# Altium PCB PMI_MotorDriver.PcbDoc
Units mil, origin at the board's own origin, x right, y up, seen from the top; angles counter-clockwise.
Board outline 1889.76 x 1535.43 mil, 2 copper layers (Top Layer, Bottom Layer); 35 components, 27 nets, 110 pads, 27 vias.
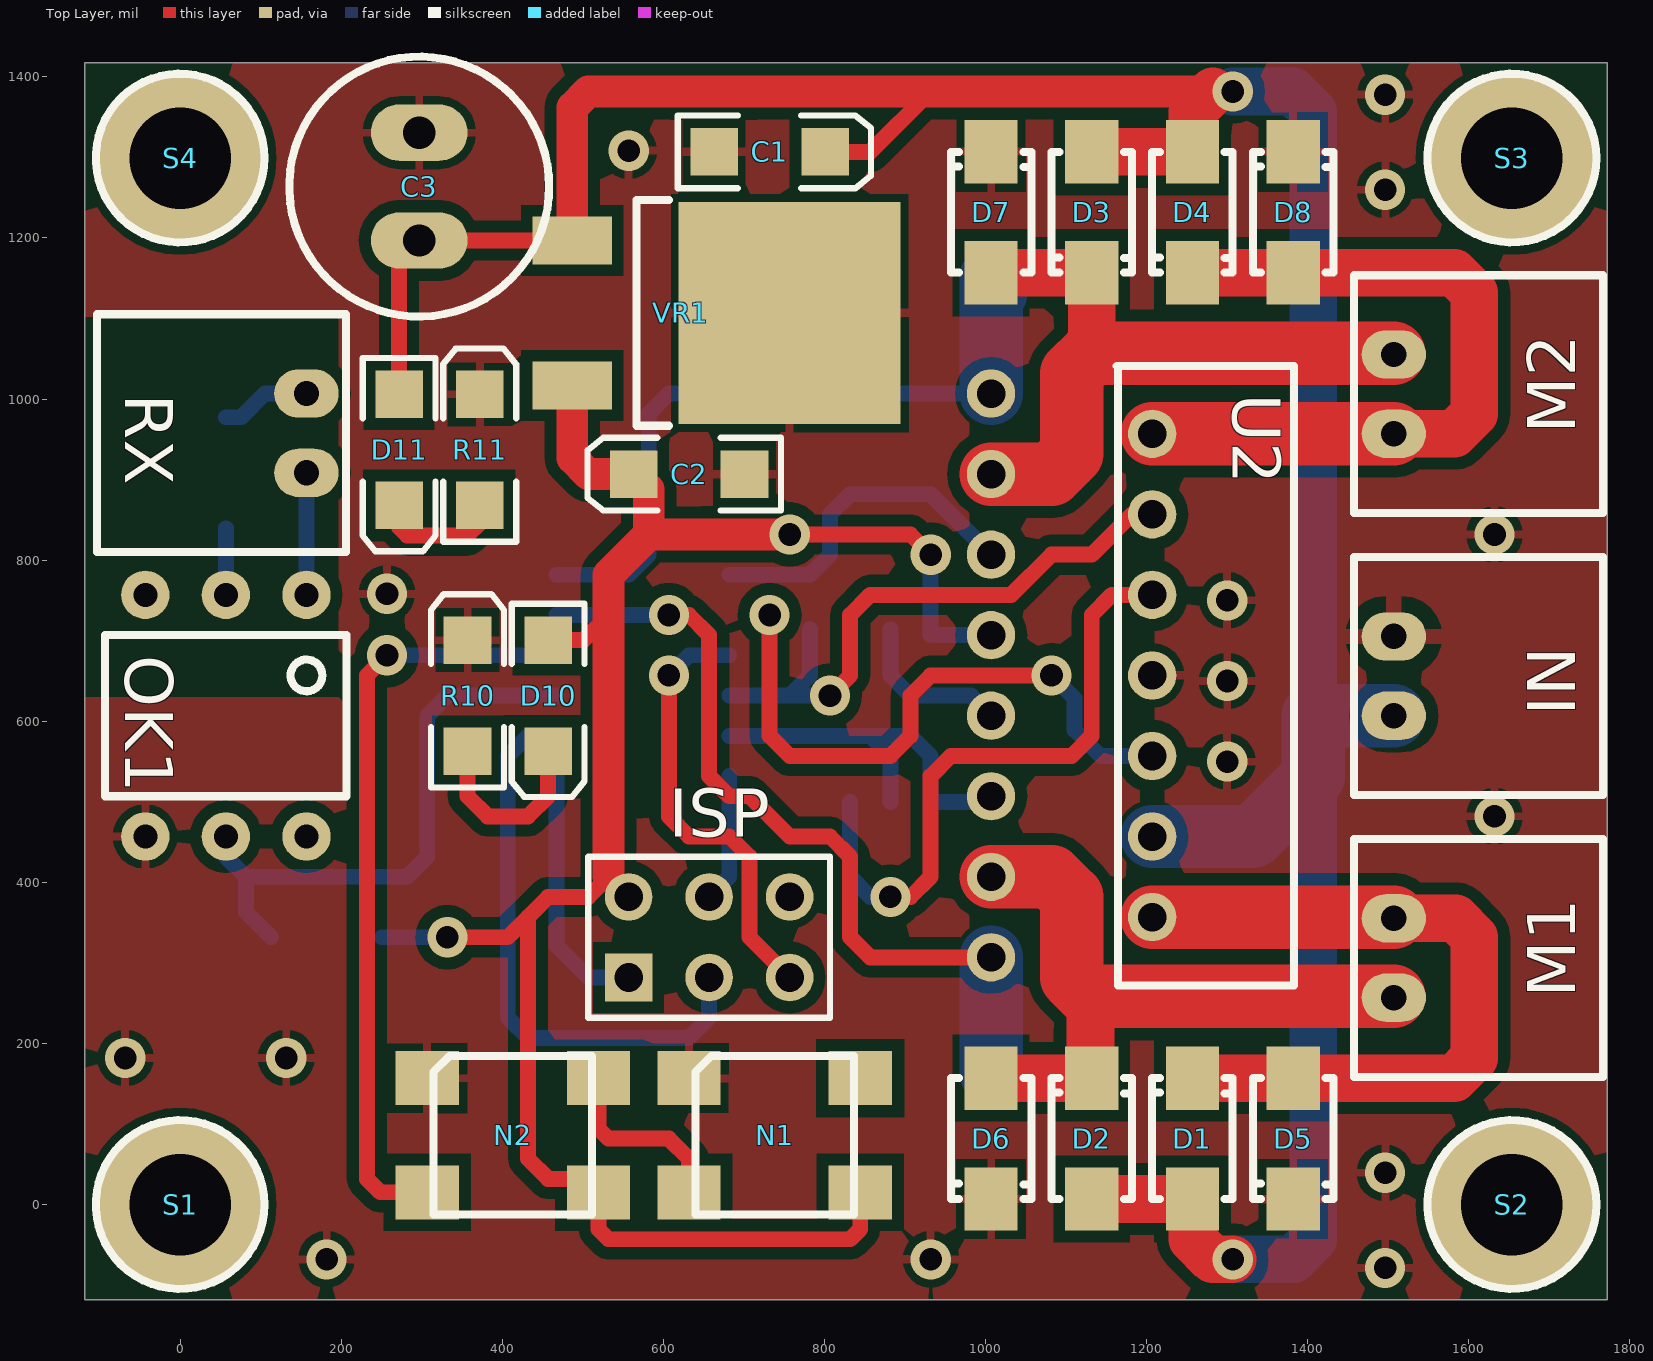
[diagram p0: Top Layer view]
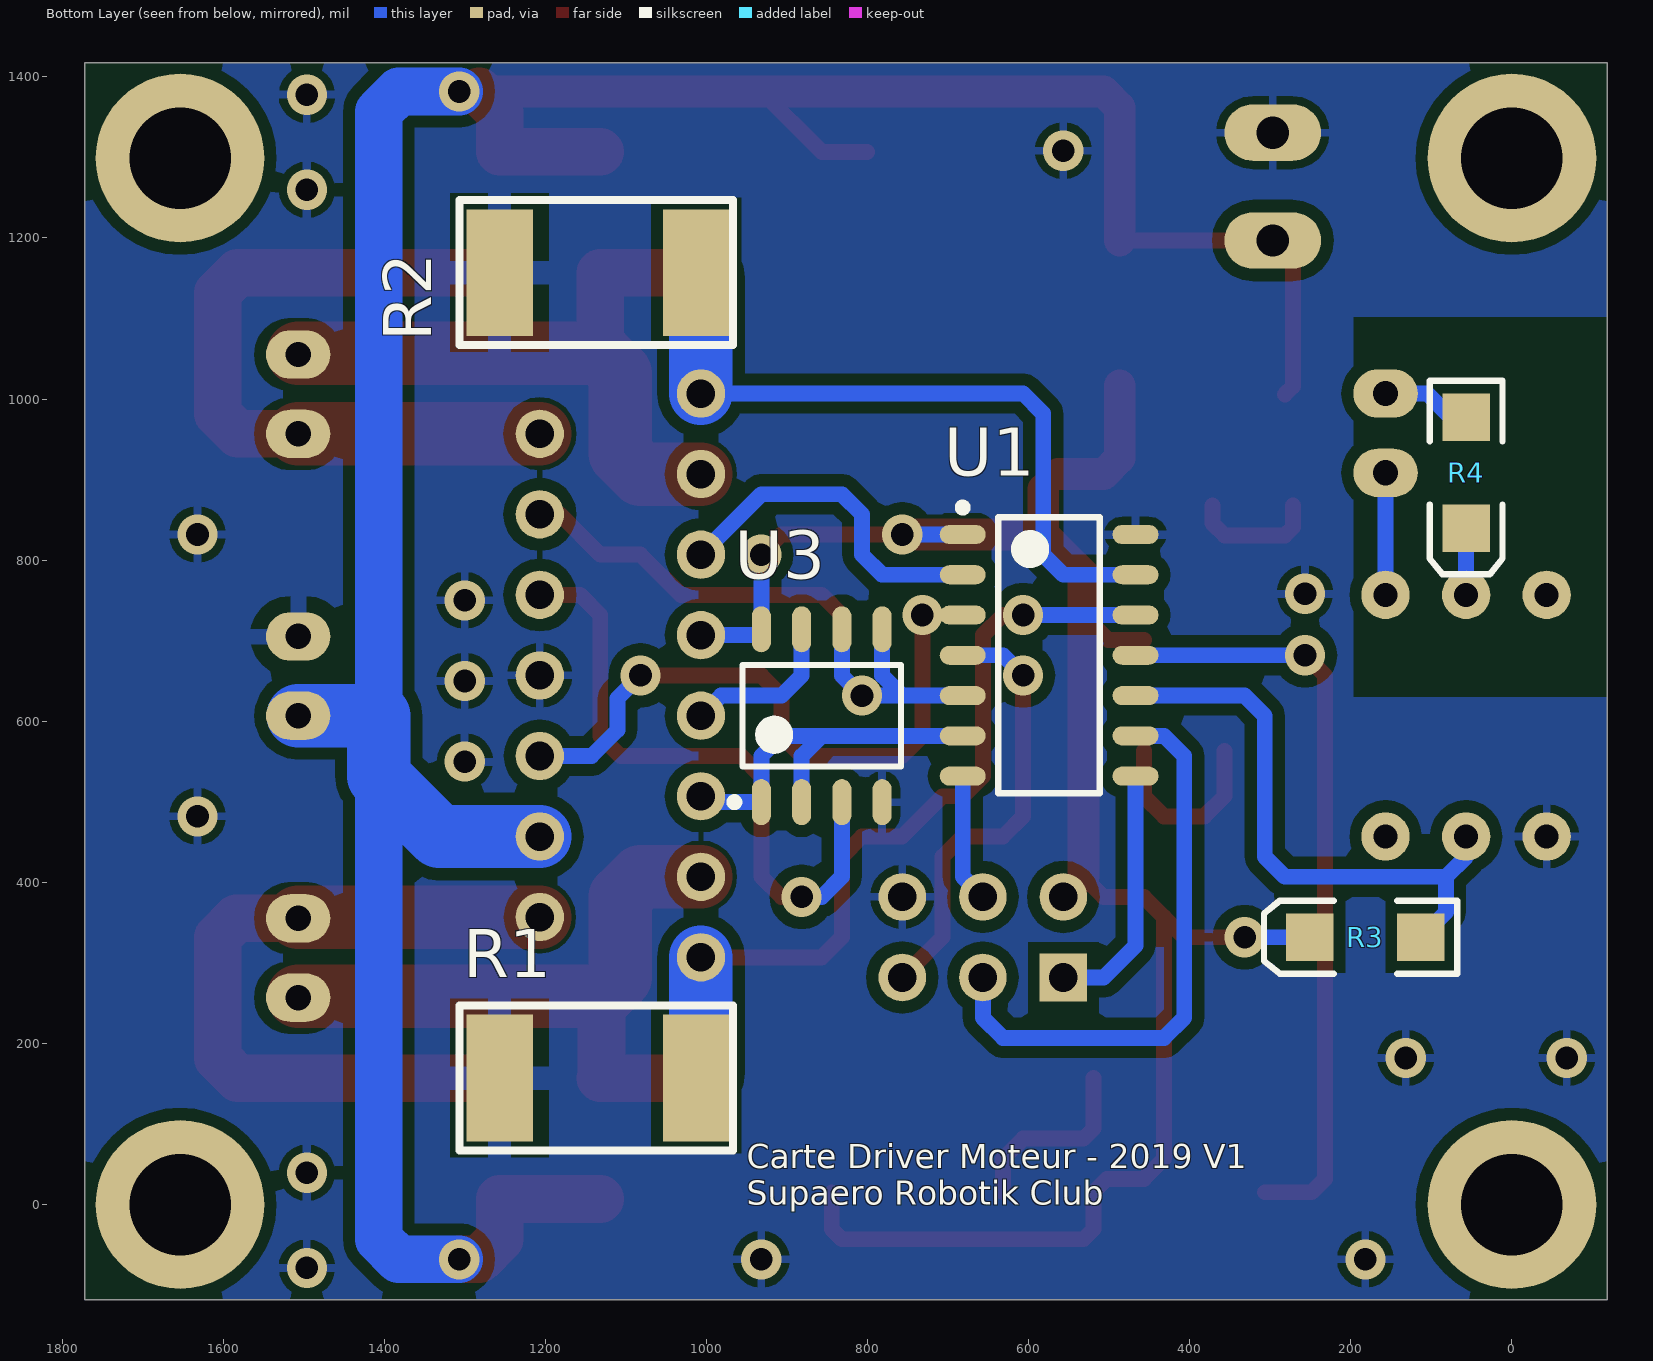
[diagram p1: Bottom Layer view, seen from below]
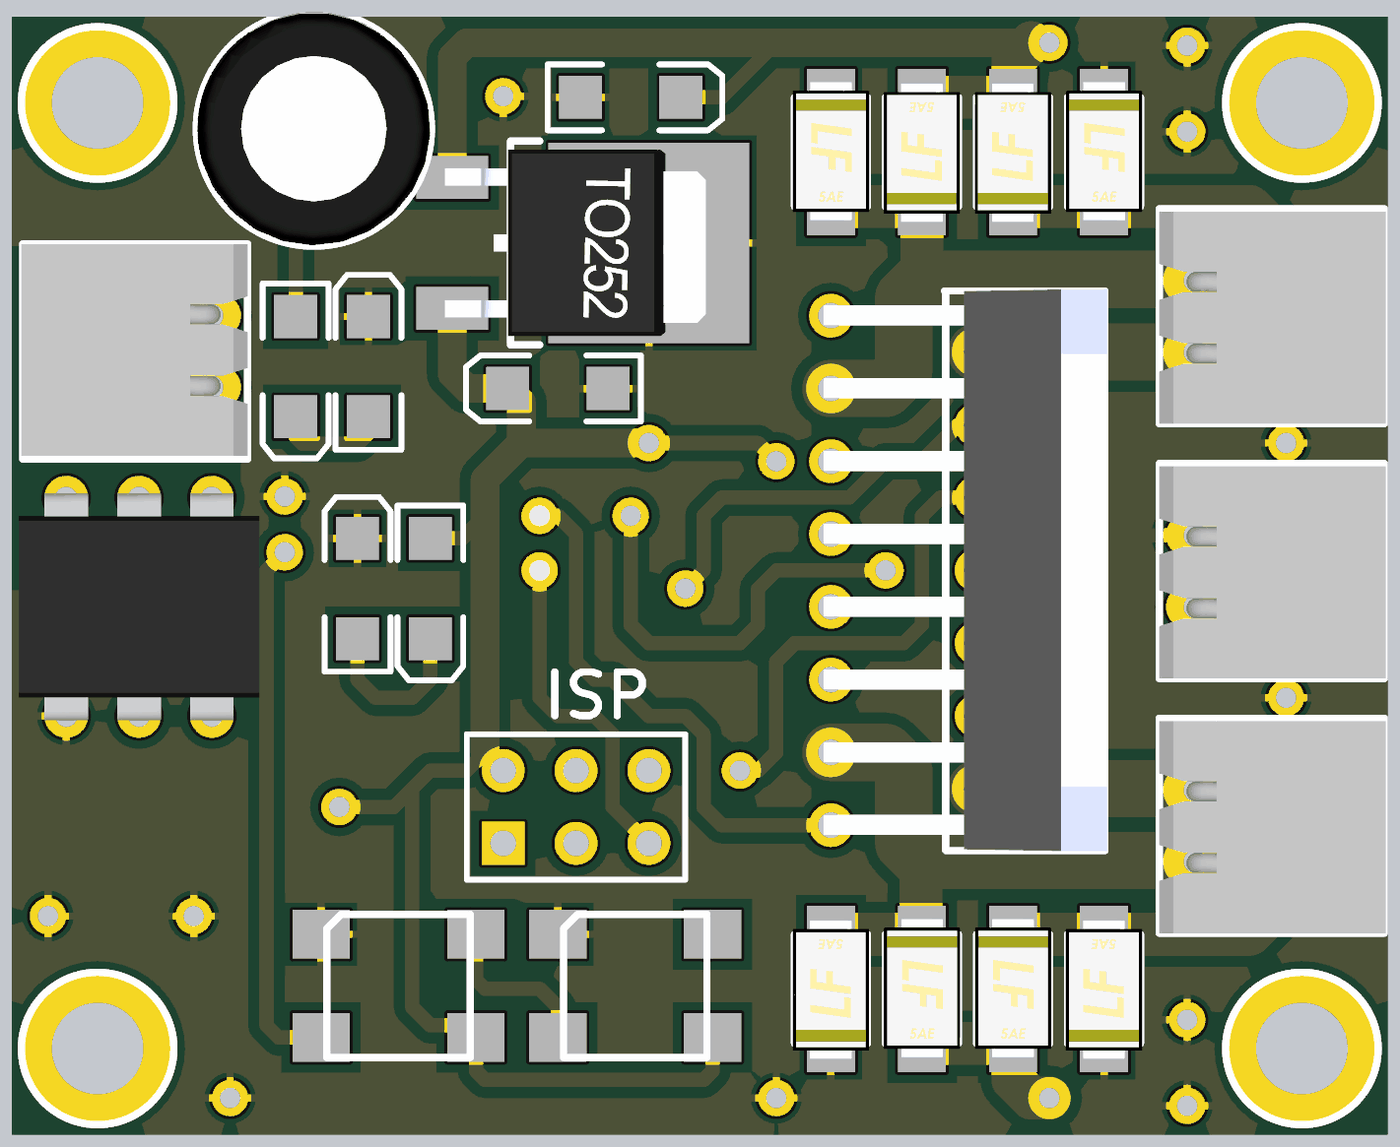
[diagram p2: 3D render of the assembled board from above, using the file's embedded part models]
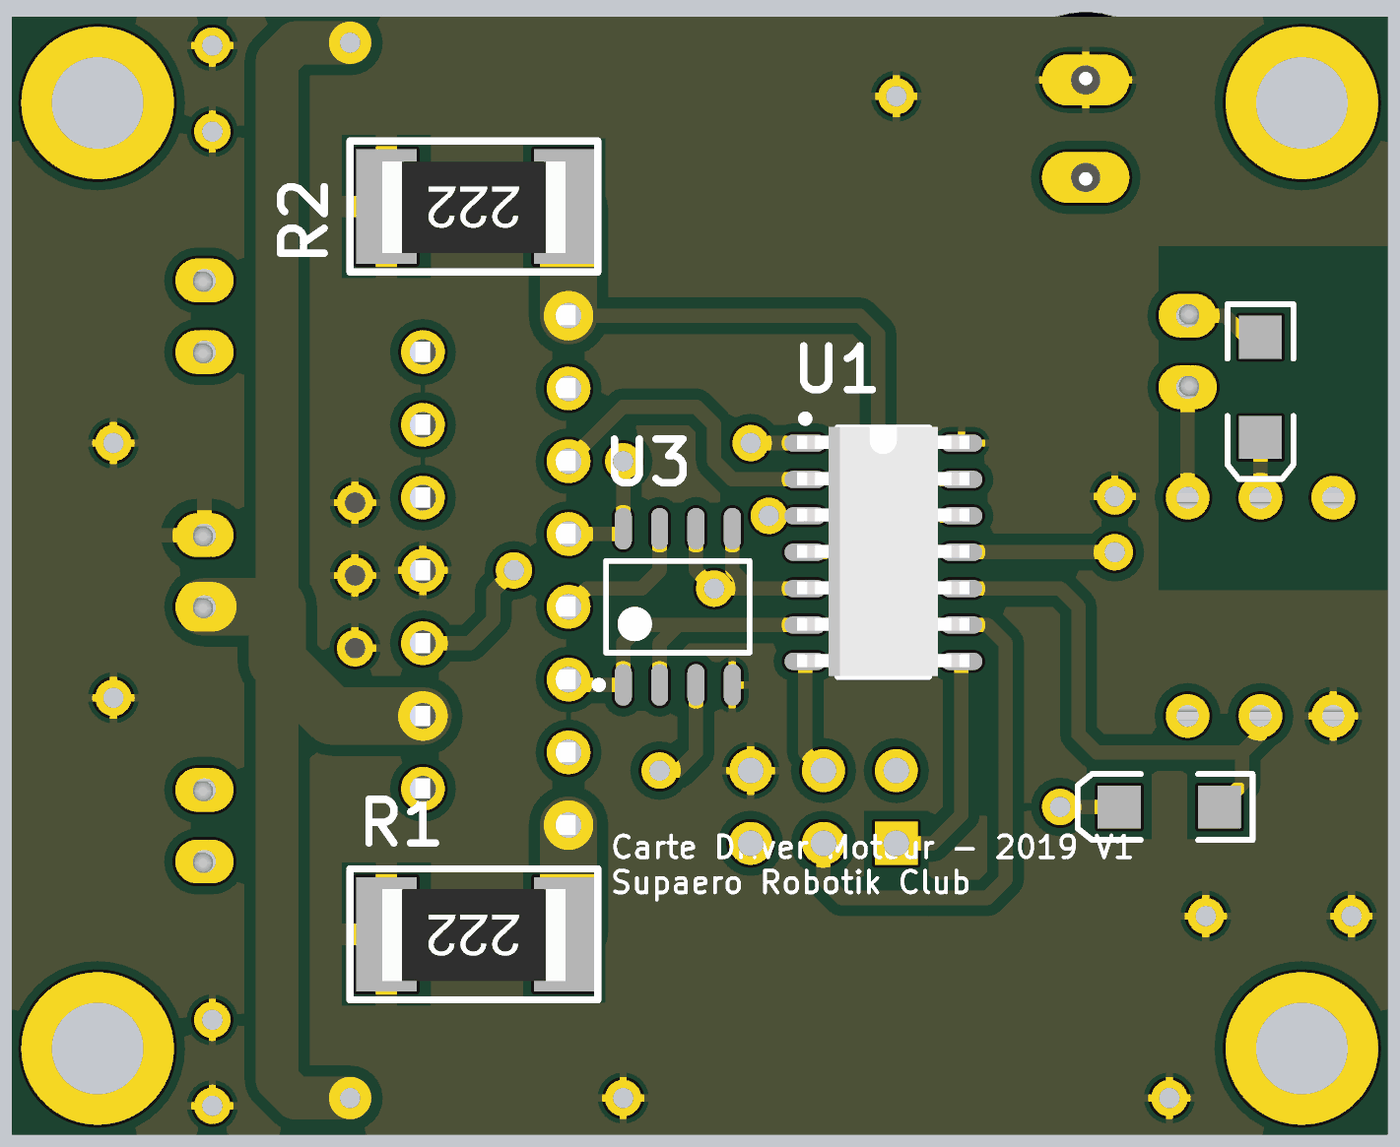
[diagram p3: 3D render of the assembled board from below, using the file's embedded part models]

## Layer stack, top to bottom
Top Solder: solder mask 0.4, Solder Resist, Dk 3.5
Top Layer: signal copper 1.4
Dielectric 1: dielectric 12.6, FR-4, Dk 4.8
Bottom Layer: signal copper 1.4
Bottom Solder: solder mask 0.4, Solder Resist, Dk 3.5

## Board outline
-118.11,-118.11 1771.65,-118.11 1771.65,1417.32 -118.11,1417.32

## Design rules (kind name [scope] priority, off if disabled: settings)
Clearance [All] p1: gap=10 except(15: Arc-Poly Track-Poly SMDPad-Poly THPad-Poly Via-Poly Fill-Poly Poly-Poly Poly-Region Poly-Text)
ComponentClearance Res&Diode [HasFootprint('3.2X1.6X1.1') vs HasFootprint('3.2X1.6X1.1')] p1: gap=0 collisioncheckmode=3 verticalgap=0 showdistances=FALSE
ComponentClearance Header3D [HasGenericStepModel] p2: gap=0 collisioncheckmode=3 verticalgap=0 showdistances=FALSE
ComponentClearance ComponentClearance_1 [All] p3: gap=10 collisioncheckmode=3 verticalgap=10 showdistances=FALSE
PlaneConnect PlaneConnect_1 [All] p1: planeconnectstyle=Relief reliefexpansion=20 reliefentries=4 reliefconductorwidth=10 reliefairgap=10
PolygonConnect VoltIn [InNet('GND_A') vs HasFootprint('Molex SPOX 2x1H')] p1: connectstyle=Relief reliefconductorwidth=19.68 reliefentries=4 polygonreliefangle="90 Angle" airgapwidth=19.68
PolygonConnect PowerResistor [HasFootprint('CRA2512')] p2: connectstyle=Relief reliefconductorwidth=29.53 reliefentries=4 polygonreliefangle="90 Angle" airgapwidth=19.68
PolygonConnect [All] p3: connectstyle=Relief reliefconductorwidth=10 reliefentries=4 polygonreliefangle="90 Angle" airgapwidth=10
RoutingVias [All] p1: holewidth=28 width=50 viastyle="Through Hole" minholewidth=28 minwidth=50 maxholewidth=28 maxwidth=50
SolderMaskExpansion [All] p1: expansion=4
Width [All] p1: maxlimit=78.74 minlimit=9.84 preferedwidth=19.68
28 further rules are at their usual default settings.

## Components (designator, comment, footprint, x,y, rotation, side; value= is the part's Value field where it differs from the comment)
C1 "Cap" 3.2X1.6X1.1 731.89,1306.89 r0 top
C2 "Cap" 3.2X1.6X1.1 631.89,906.89 r180 top
C3 "Cap2" Condensateur 296.89,1196.89 r90 top
D1 "GF1G-E3/5CA (710-2976)" DO-214BA 1256.89,156.89 r270 top
D2 "Diode" DO-214BA 1131.89,156.89 r270 top
D3 "Diode" DO-214BA 1131.89,1156.89 r90 top
D4 "Diode" DO-214BA 1256.89,1156.89 r90 top
D5 "Diode" DO-214BA 1381.89,6.89 r90 top
D6 "Diode" DO-214BA 1006.89,6.89 r90 top
D7 "Diode" DO-214BA 1006.89,1306.89 r270 top
D8 "Diode" DO-214BA 1381.89,1306.89 r270 top
D10 "LED2" 3.2X1.6X1.1 456.89,631.89 r270 top
D11 "LED2" 3.2X1.6X1.1 271.89,936.89 r270 top
IN "Header 2H" "Molex SPOX 2x1H" 1506.89,606.89 r90 top
ISP "Header 3X2" HDR2X3 556.89,281.89 r0 top
M1 "Header 2H" "Molex SPOX 2x1H" 1506.89,256.89 r90 top
M2 "Header 2H" "Molex SPOX 2x1H" 1506.89,956.89 r90 top
N1 "NeoPixel" Neopixel 631.89,156.89 r0 top
N2 "NeoPixel" Neopixel 306.89,156.89 r0 top
OK1 "4N26" 4N26 156.89,756.89 r270 top
R1 "Res2" CRA2512 1256.89,156.89 r180 bottom
R2 "Res2" CRA2512 1256.89,1156.89 r180 bottom
R3 "Res2" 3.2X1.6X1.1 181.89,331.89 r0 bottom
R4 "Res2" 3.2X1.6X1.1 56.89,908.46 r270 bottom
R10 "Res2" 3.2X1.6X1.1 356.89,631.89 r90 top
R11 "Res2" 3.2X1.6X1.1 371.89,936.89 r90 top
RX "Header 2H" "Molex SPOX 2x1H" 156.89,1006.89 r270 top
S1 "Screw M3" "Screw M3" 0,0 r0 top
S2 "Screw M3" "Screw M3" 1653.54,0 r0 top
S3 "Screw M3" "Screw M3" 1653.54,1299.21 r0 top
S4 "Screw M3" "Screw M3" 0,1299.21 r0 top
U1 "Attiny84" "ATTINY84 SOIC" 681.89,831.89 r180 bottom locked
U2 "L298N" L298N 1006.89,306.89 r90 top locked
U3 "NAND Double" SOIC_8 856.89,606.89 r90 bottom locked
VR1 "BA178M05FP-E2" TO-252 756.89,1106.89 r270 top

## Footprints (in the part's own frame and the unit in brackets; to place one, negate y for a bottom-side part, rotate by r counter-clockwise, add the part's x,y. Pads: shape width x height; smd on the part's side, far side on the other; paste and mask are expansions set on the pad)
3.2X1.6X1.1 [mm] "SMT LED; 2 Flat Leads"
  rect 1.5x1.5 smd: 1(-1.75,0) 2(1.75,0)
  silkscreen extent -2.9,-1.15 3.2,1.15
4N26 [mil] "Optocoupler, PDIP"
  round 60 hole 30: 1(0,0) 2(0,-100) 3(0,-200) 4(300,-200) 5(300,-100) 6(300,0)
  silkscreen extent 50,-250 250,50, body extent -6,-265 306,65, height 179
"ATTINY84 SOIC" [mm] "Attiny84 SOIC"
  oval 1.45x0.6 smd: 1(0,0) 2(0,-1.27) 3(0,-2.54) 4(0,-3.81) 5(0,-5.08) 6(0,-6.35) 7(0,-7.62) 8(5.45,-7.62) 9(5.45,-6.35) 10(5.45,-5.08) 11(5.45,-3.81) 12(5.45,-2.54) 13(5.45,-1.27) 14(5.45,0)
  silkscreen extent -0.13,-8.16 4.33,0.97, body extent -0.28,-8.13 5.72,0.57, height 1.63
Condensateur [mil]
  oval 70x120 hole 40: 1(0,0) 2(133.86,0)
  silkscreen extent -94,-161 228,161, body extent -93,-160 227,160, height 500
CRA2512 [mm] "Power resistor, 0,1 Ohm, 3W (693-4394)"
  rect 2.1x4 smd: 1(0,0) 2(6.2,0)
  silkscreen extent -1.27,-2.29 7.37,2.29, body extent -0.15,-1.63 6.25,1.57, height 0.6
DO-214BA [mm] "DO-214BA (GF1)"
  rect 2x1.68 smd: 1(0,0) 2(3.81,0)
  silkscreen extent 0,-1.27 3.81,1.27, body extent -0.54,-1.33 4.3,1.34, height 2.35
HDR2X3 [mm] "Connector; Header; 3x2 Position"
  rect 1.5x1.5 hole 0.9: 1(0,0)
  round 1.5 hole 0.9: 2(0,2.54) 3(2.54,0) 4(2.54,2.54) 5(5.08,0) 6(5.08,2.54)
  silkscreen extent -1.27,-1.27 6.35,3.81
L298N [mil] "Motor driver, 2 channel"
  round 60 hole 35.43: 1(0,0) 2(50,-200) 3(100,0) 4(150,-200) 5(200,0) 6(250,-200) 7(300,0) 8(350,-200) 9(400,0) 10(450,-200) 11(500,0) 12(550,-200) 13(600,0) 14(650,-200) 15(700,0)
  silkscreen extent -35,-376 734,-156, body extent -36,-379 736,10, height 846
"Molex SPOX 2x1H" [mil] "Prise CI, Molex, 3 Contacts, 1 rangée, entraxe 2.5mm, 3A, Coudé, ref 22-03-5035"
  oval 60x80 hole 31.5: 1(0,0) 2(98.43,0)
  silkscreen extent -98,-260 197,49, body extent -98,-262 193,49, height 193
Neopixel [mm]
  rect 2x1.7 smd: 1(0,0) 2(0,-3.6) 3(5.4,-3.6) 4(5.4,0)
  silkscreen extent 0.2,-4.3 5.2,0.7, body extent 0.19,-4.33 5.19,0.67, height 2
"Screw M3" [mm] "M3 iso Screw"
  round 5.32 hole 3.2 unplated: 0(0,0)
  silkscreen extent -2.66,-2.66 2.66,2.66
SOIC_8 [mm] "SOIC, 8-Leads, Body 4,90x3,90mm, Pitch 1,27mm, IPC Medium Density"
  oval 1.45x0.6 smd: 1(-2.725,1.905) 2(-2.725,0.635) 3(-2.725,-0.635) 4(-2.725,-1.905) 5(2.725,-1.905) 6(2.725,-0.635) 7(2.725,0.635) 8(2.725,1.905)
  silkscreen extent -2.85,-2.5 1.6,2.88, body extent -2,-2.5 2,2.5, height 1.75
TO-252 [mm] "TO-252 standard package"
  rect 1.5x2.5 smd: 1(-2.286,-6.858) 3(2.286,-6.858)
  rect 7x7 smd: 2(0,0)
  silkscreen extent -3.56,-4.83 3.56,-3.81, body extent -3.25,-7.11 3.25,1.99, height 2.41

## Part data
C1 C2 C3: "Capacitor"
D1: library part Diode, "Default Diode"
D2 D3 D4 D5 D6 D7 D8: "Default Diode"
D10 D11: "Typical RED, GREEN, YELLOW, AMBER GaAs LED"
IN M1 M2 RX: "Header, 2-Pin, Right Angle"
ISP: "Header, 3-Pin, Dual row"
OK1: library part Optoisolator1, "4-Pin Phototransistor Optocoupler"
R1 R2 R3 R4 R10 R11: "Resistor"
U2: "Motor Driver 2 outputs"
VR1: library part "Volt Reg", "Voltage Regulator"

## Via types
v1: diameter 50, hole 28, Top Layer to Bottom Layer, 27 vias

## Nets (pads, with @x,y where several pads share a name; then routed paths per layer and width w, separated by ;. In a path a pad name is that pad's centre, name@x,y a point inside that pad or via, vN(x,y) a via of type N, cw(c..) or ccw(c..) an arc to the next point about the centre after c; other vN are vias at no path point)
5V_L: C2.2 D10.1 ISP.2 N1.3 N2.3 R3.2 U1.1 U2.9 U3.8 VR1.3 | length 2548.1
  Top Layer w19.68: v1(331.89,331.89) 406.89,331.89 431.89,356.89 ; D10.1 500.79,700.79 531.89,731.89 ; 531.89,406.89 506.89,381.89 456.89,381.89 431.89,356.89 ; C2.2 C2.2@581.89,887.99 ; v1(756.89,831.89) 906.89,831.89 v1(931.89,806.89) ; N1.3 844.49,-30.51 831.89,-43.11 531.89,-43.11 519.49,-30.71 N2.3 502.76,31.89 456.89,31.89 431.89,56.89 431.89,356.89
  Top Layer w39.37: VR1.3 486.89,926.89 506.89,906.89 C2.2 ; 531.89,406.89 531.89,731.89 531.89,781.89 581.89,831.89 ; C2.2@581.89,887.99 581.89,831.89 ; v1(756.89,831.89) 581.89,831.89
  Bottom Layer w19.68: R3.2 v1(331.89,331.89) ; U1.1 v1(756.89,831.89) ; U3.8@931.89,706.89 v1(931.89,806.89) ; U3.8 939.17,706.89 U2.9
EN_A: U1.3 U2.6 | length 770.4
  Top Layer w19.68: v1(731.89,731.89) 731.89,581.89 756.89,556.89 881.89,556.89 906.89,581.89 906.89,631.89 931.89,656.89 v1(1081.89,656.89)
  Bottom Layer w19.68: v1(1081.89,656.89) 1110.42,628.36 1110.42,589.18 1142.71,556.89 U2.6
EN_B: U1.2 U2.11 | length 426.8
  Bottom Layer w19.68: U1.2 781.89,781.89 806.89,806.89 806.89,856.89 831.89,881.89 931.89,881.89 U2.11
GND_A: C1.1 C2.1 C3.2 D5.1 D6.1 D7.1 D8.1 IN.2 ISP.6 N1.1 N2.1 OK1.4 R1.1 R2.1 R10.2 R11.2 U1.14 U2.8 U3.4 VR1.2
  other v1: 1496.06,-78.74 181.89,-68.11 931.89,-68.11 1496.06,39.37 -68.11,181.89 131.89,181.89 1631.89,481.89 1300,550 1300,650 1300,750 256.89,758.46 1631.89,831.89 1496.06,1259.84 556.89,1308.46 1496.06,1377.95
IN_1: U1.6 U2.5 U3.1 U3.2 | length 478
  Bottom Layer w19.68: U1.6 856.89,581.89 ; U3.2 881.89,556.89 856.89,581.89 ; U2.5@999.61,499.61 U3.1 931.89,556.89 906.89,581.89 856.89,581.89
IN_2: U2.7 U3.7 | length 203
  Bottom Layer w19.68: U3.7 881.89,656.89 906.89,631.89 981.89,631.89 U2.7
IN_3: U2.10 U3.3 | length 794.5
  Top Layer w19.68: v1(881.89,381.89) 906.89,381.89 931.89,406.89 931.89,531.89 956.89,556.89 1106.89,556.89 1131.89,581.89 1131.89,731.89 1156.89,756.89 U2.10
  Bottom Layer w19.68: U3.3 831.89,406.89 856.89,381.89 v1(881.89,381.89)
IN_4: U1.5 U2.12 U3.5 U3.6 | length 847.4
  Top Layer w19.68: v1(806.89,631.89) 831.89,656.89 831.89,731.89 856.89,756.89 1031.89,756.89 1081.89,806.89 1131.89,806.89 1181.89,856.89 U2.12
  Bottom Layer w19.68: U1.5 756.89,631.89 ; U3.5 781.89,656.89 756.89,631.89 ; U3.6 831.89,656.89 v1(806.89,631.89) 756.89,631.89
MISO: ISP.1 U1.8 | length 316.4
  Bottom Layer w19.68: U1.8 467.32,321.46 506.89,281.89 ISP.1
MOSI: ISP.4 U1.7 | length 160.4
  Bottom Layer w19.68: ISP.4 681.89,406.89 U1.7
NetD10_2: D10.2 R10.1 | length 232.9
  Top Layer w19.68: R10.1 356.89,506.89 381.89,481.89 431.89,481.89 456.89,506.89 D10.2
NetD11_2: D11.2 R11.1 | length 159.8
  Top Layer w19.68: D11.2 271.89,840.79 281.89,830.79 356.89,830.79 371.89,845.79 R11.1
NetN1_3: N1.2 N2.4 | length 232.2
  Top Layer w19.68: N2.4 519.49,94.29 531.89,81.89 606.89,81.89 631.89,56.89 N1.2
NetOK1_1: OK1.1 RX.2 | length 151.6
  Bottom Layer w19.68: OK1.1 RX.2
NetOK1_2: OK1.2 R4.2 | length 82.7
  Bottom Layer w19.68: OK1.2 R4.2
NetR4_1: R4.1 RX.1 | length 112.2
  Bottom Layer w19.68: R4.1 75.79,977.36 105.31,1006.89 RX.1
OUT_1: D1.1 D5.2 M1.2 U2.2 | length 920.1
  Top Layer w59.06: D1.1 1581.89,156.89 1606.89,181.89 1606.89,331.89 1583.46,355.31 M1.2
  Top Layer w78.74: U2.2 M1.2@1506.89,356.89
OUT_2: D2.1 D6.2 M1.1 U2.3 | length 847.3
  Top Layer w19.68: D2.1@1130.32,158.46 D2.1
  Top Layer w59.06: D6.2 D2.1 ; D2.1@1130.32,158.46 1130.32,258.46
  Top Layer w78.74: U2.3 1081.89,406.89 1106.89,381.89 1106.89,281.89 1130.32,258.46 M1.1@1506.89,258.46
OUT_3: D3.1 D7.2 M2.2 U2.13 | length 845.7
  Top Layer w59.06: D7.2 D3.1 1131.89,1056.89
  Top Layer w78.74: U2.13 1081.89,906.89 1106.89,931.89 1106.89,1031.89 1131.89,1056.89 M2.2@1506.89,1056.89
OUT_4: D4.1 D8.2 M2.1 U2.14 | length 920.7
  Top Layer w59.06: D4.1 D8.2 1581.89,1156.89 1606.89,1131.89 1606.89,981.89 1581.89,956.89 M2.1
  Top Layer w78.74: U2.14 M2.1
PIXELS: N2.2 U1.11 | length 952.7
  Top Layer w19.68: v1(256.89,681.89) 231.89,656.89 231.89,31.89 248.62,15.16 N2.2
  Bottom Layer w19.68: v1(256.89,681.89) U1.11
RST: ISP.5 U1.4 | length 551.8
  Top Layer w19.68: v1(606.89,656.89) 606.89,481.89 631.89,456.89 681.89,456.89 706.89,431.89 706.89,331.89 ISP.5
  Bottom Layer w19.68: v1(606.89,656.89) 631.89,681.89 U1.4
RX: OK1.5 R3.1 U1.10 | length 729.4
  Bottom Layer w19.68: OK1.5 56.89,431.89 81.89,406.89 ; R3.1 81.89,362.99 81.89,406.89 ; U1.10 331.89,631.89 306.89,606.89 306.89,431.89 281.89,406.89 81.89,406.89
SCK: ISP.3 U1.9 | length 716.5
  Bottom Layer w19.68: U1.9 431.89,581.89 406.89,556.89 406.89,231.89 431.89,206.89 631.89,206.89 656.89,231.89 ISP.3
SEN_A: R1.2 U1.12 U2.1 | length 1020.8
  Top Layer w19.68: v1(606.89,731.89) 631.89,731.89 656.89,706.89 656.89,531.89 681.89,506.89 706.89,506.89 756.89,456.89 806.89,456.89 831.89,431.89 831.89,331.89 856.89,306.89 U2.1
  Bottom Layer w19.68: U1.12 v1(606.89,731.89)
  Bottom Layer w78.74: R1.2@1006.89,162.8 U2.1
SEN_B: R2.2 U1.13 U2.15 | length 887.7
  Bottom Layer w19.68: U1.13 556.89,781.89 581.89,806.89 581.89,981.89 606.89,1006.89 U2.15
  Bottom Layer w78.74: U2.15 R2.2@1006.89,1125.98 ; R2.2@1006.89,1150.98 R2.2@1006.89,1125.98 ; R2.2@1012.8,1131.89 R2.2@1006.89,1125.98
VS: C1.2 C3.1 D1.2 D2.2 D3.2 D4.2 D11.1 IN.1 U2.4 VR1.1 | length 3948.5
  Top Layer w19.68: D11.1@281.89,1005.79 271.89,1015.79 271.89,1171.89 C3.1 VR1.1 ; C1.2 856.89,1306.89 931.89,1381.89 ; v1@1281.89,1381.89 v1(1306.89,1381.89)
  Top Layer w39.37: VR1.1 486.89,1361.89 506.89,1381.89 931.89,1381.89 v1@1281.89,1381.89
  Top Layer w59.06: D2.2 D1.2 1256.89,-43.11 1281.89,-68.11 v1(1306.89,-68.11) ; D3.2 D4.2 1256.89,1356.89 v1@1281.89,1381.89
  Bottom Layer w59.06: v1(1306.89,-68.11) 1381.89,-68.11 1406.89,-43.11 1406.89,531.89 ; v1(1306.89,1381.89) 1381.89,1381.89 1406.89,1356.89 1406.89,606.89
  Bottom Layer w78.74: U2.4 1331.89,456.89 1406.89,531.89 1406.89,606.89 IN.1
pads on no net: N1.4 OK1.3 OK1.6 S1.0 S2.0 S3.0 S4.0

## Polygon pours and split planes (outlines as drawn)
GND_A on Bottom Layer "Bot GND_L" (solid, pour order 0): -118.11,1417.32 1771.65,1417.32 1771.65,-118.11 -118.11,-118.11 -118.11,629.92 196.85,629.92 196.85,1102.36 -118.11,1102.36
GND_A on Top Layer "Bot GND_L" (solid, pour order 2): -118.11,1417.32 1771.65,1417.32 1771.65,-118.11 -118.11,-118.11 -118.11,629.92 196.85,629.92 196.85,1102.36 -118.11,1102.36

## Silkscreen, mask and mechanical layers (free items; w line width, h text height)
Bottom Overlay:
  text "Carte Driver Moteur - 2019 V1 / Supaero Robotik Club" at 950,0 h30
Mechanical 2:
  the board outline again, w10

## Dimensions
-118.11,-118.11 to 1771.65,-118.11 on Mechanical 15
-118.11,1417.32 to -118.11,-118.11 on Mechanical 15
0,0 to -118.11,-118.11 on Mechanical 15
-118.11,-118.11 to 0,0 on Mechanical 15